# Allegro board CAEN_BUFFER.brd

Outline 406.4 x 406.4 mm; copper layers: TOP, VTT, GND, VCC, BOTTOM. Coordinates in mm from the lower left corner of the outline.
Outline path: rectangle 0,0 406.4,406.4

## Placement (name value [footprint] x y rotation side)
C1  1.0UF  [CAP805]  188.21 233.81 180 bottom
C2  1UF  [CAP805]  201.68 250.95 90 top
C3  1UF  [CAP805]  197.87 250.95 90 top
C4  1UF  [CAP805]  210.06 252.48 270 top
C5  1UF  [CAP805]  210.06 244.6 270 top
R1  -  [RES805]  188.21 247.27 180 bottom
R2  -  [RES805]  188.21 242.7 180 bottom
R3  -  [RES805]  188.21 238.38 0 bottom
R4  -  [RES805]  188.21 256.29 0 bottom
R5  -  [RES805]  191.77 233.81 180 bottom
R6  -  [RES805]  188.21 228.98 180 bottom
R7  -  [RES805]  191.77 238.38 0 bottom
R8  -  [RES805]  191.77 242.7 180 bottom
R9  111  [RES805]  191.77 228.98 180 bottom
R10  -  [RES805]  194.82 233.81 180 bottom
R11  -  [RES805]  188.21 251.97 180 bottom
R12  0  [RES805]  190.75 256.29 180 bottom
R13  0  [RES805]  190.75 251.97 180 bottom
R14  -  [RES805]  193.55 251.97 0 bottom
R15  -  [RES805]  193.55 256.29 180 bottom
R16  0  [RES805]  204.72 228.98 180 bottom
R17  0  [RES805]  204.98 243.84 180 bottom
R18  -  [RES805]  204.98 239.27 0 bottom
R19  0  [RES805]  206.5 255.27 0 top
R20  0  [RES805]  204.98 234.19 180 bottom
U1  -  [COTO2300_V1]  199.64 237.49 0 top
U2  ***  [SOIC8]  198.63 255.27 0 top
U3  ***  [SOIC8]  210.06 248.41 0 top
U4  -  [DO35]  213.61 237.74 180 top
U5  -  [DO35]  209.55 228.6 0 top

## Library data of the parts
C1 = CSMD0805: part number: CSMD0805-1.0UF,10%,0805,25V
C2-C5 = CSMD0805: part number: CSMD0805-1UF,10%,0805,25V
R1-R8 R10 R11 R14 R15 R18 = RES_L: alternate symbols: (RES400)
R9 = RSMD0805: part number: RSMD0805-111,1%,0805
R12 R13 R16 R17 R19 R20 = RSMD0805: part number: RSMD0805-0,1%,0805
U1 = COTO2342
U2 U3 = THS3062
U4 U5 = 1N4448

## Footprints (pads in the part's own frame, mm; a bottom-side part is the same pattern mirrored in y, then rotated)
CAP805
  rect 1.372x1.27 smd: 1(0,1) 2(0,-1)
COTO2300_V1
  round 1.016 hole 0.533: 1(-1.27,8.89) 2(-1.27,6.35) 3(-1.27,-6.35) 4(-1.27,-8.89) 5(1.27,-8.89) 6(1.27,-6.35) 7(1.27,6.35) 8(1.27,8.89)
DO35
  rect 1.397x1.397 hole 0.635: 1(0,0)
  round 1.397 hole 0.635: 2(0,9.144)
RES805
  rect 1.372x1.27 smd: 1(0,1) 2(0,-1)
SOIC8
  rect 1.27x0.635 smd: 1(-2.477,1.905) 2(-2.477,0.635) 3(-2.477,-0.635) 4(-2.477,-1.905) 5(2.477,-1.905) 6(2.477,-0.635) 7(2.477,0.635) 8(2.477,1.905)

## Nets
GND_POWER: R3.1(A<0>) R9.1(A<0>) R10.1(A<0>) R14.1(A<0>) U4.2(OUT)
VCC: U1.3(CTRL_OUT)
VCC5M: R11.1(A<0>)
VCC15: C2.2(B<0>) C4.2(B<0>)
VCC15M: C3.2(B<0>) C5.1(A<0>)
CTRL: R7.1(A<0>)
IN: R1.1(A<0>) R2.1(A<0>) R4.1(A<0>)
OUT: R19.2(B<0>)
OUT_ATT: R20.2(B<0>) U4.1(IN) U5.2(OUT)
UNNAMED_1_COTO2342_I12_CTRLIN: R7.2(B<0>) U1.2(CTRL_IN)
UNNAMED_1_COTO2342_I12_IN1: R16.1(A<0>) U1.5(IN1)
UNNAMED_1_COTO2342_I12_IN2: R17.1(A<0>) U1.8(IN2)
UNNAMED_1_COTO2342_I12_NC1: R8.2(B<0>) U1.7(NC1)
UNNAMED_1_COTO2342_I12_NC2: R6.2(B<0>) R9.2(B<0>) U1.6(NC2)
UNNAMED_1_COTO2342_I12_NO1: R1.2(B<0>) U1.1(NO1)
UNNAMED_1_COTO2342_I12_NO2: R5.2(B<0>) R10.2(B<0>) U1.4(NO2)
UNNAMED_1_CSMD0805_I27_B: C5.2(B<0>) U3.4(VCC-)
UNNAMED_1_CSMD0805_I28_A: C4.1(A<0>) U3.8(VCC+)
UNNAMED_1_CSMD0805_I29_A: C3.1(A<0>) U2.4(VCC-)
UNNAMED_1_CSMD0805_I30_A: C2.1(A<0>) U2.8(VCC+)
UNNAMED_1_CSMD0805_I38_B: C1.2(B<0>) R5.1(A<0>) R6.1(A<0>)
UNNAMED_1_RESL_I1_B: R4.2(B<0>) R12.1(A<0>)
UNNAMED_1_RESL_I6_B: R11.2(B<0>) R13.1(A<0>)
UNNAMED_1_RESL_I10_B: R2.2(B<0>) R3.2(B<0>) R8.1(A<0>)
UNNAMED_1_RESL_I16_B: R13.2(B<0>) R14.2(B<0>) U2.3(IN+)
UNNAMED_1_RESL_I18_A: R12.2(B<0>) R15.1(A<0>) U2.2(IN-)
UNNAMED_1_RESL_I18_B: R15.2(B<0>) R19.1(A<0>) U2.1(OUT)
UNNAMED_1_RESL_I20_A: R16.2(B<0>) R18.1(A<0>) U3.2(IN-)
UNNAMED_1_RESL_I20_B: R18.2(B<0>) R20.1(A<0>) U3.1(OUT)
UNNAMED_1_RSMD0805_I32_B: R17.2(B<0>) U3.3(IN+)
VREF2M: U5.1(IN)
VREF5M: C1.1(A<0>)

Pads without a net: U2 5 6 7; U3 5 6 7

## Via types
v1: diameter 0.61, hole 0.33, TOP to BOTTOM, 8 vias

## Routing (per net, layer and track width the routed paths; a pad name or vN(x,y) marks a point on that pad's centre or on a via; arc(x,y) is an arc through that point)
OUT_ATT: length 15.4
  TOP w0.127: U4.1 U5.2
  BOTTOM w0.127: U5.2 209.55,232.11 204.98,232.11 R20.2
UNNAMED_1_COTO2342_I12_CTRLIN: length 19.4
  BOTTOM w0.127: R7.2 201.87,239.38 201.87,244.54 198.37,244.54 U1.2
UNNAMED_1_COTO2342_I12_IN1: length 5.2
  BOTTOM w0.127: R16.1 200.91,229.98 U1.5
UNNAMED_1_COTO2342_I12_IN2: length 5.6
  BOTTOM w0.127: R17.1 204.98,246.38 U1.8
UNNAMED_1_COTO2342_I12_NC1: length 12.9
  BOTTOM w0.127: U1.7 200.91,240.87 191.77,240.87 R8.2
UNNAMED_1_COTO2342_I12_NC2: length 19.5
  TOP w0.127: U1.6 199.58,231.14 199.58,227.16 v1(190.63,227.16)
  BOTTOM w0.127: R9.2 191.77,227.16 v1(190.63,227.16) 188.21,227.16 R6.2
UNNAMED_1_COTO2342_I12_NO1: length 11.9
  BOTTOM w0.127: R1.2 188.21,245.44 198.37,245.44 U1.1
UNNAMED_1_COTO2342_I12_NO2: length 18.6
  TOP w0.127: v1(191.77,231.44) 191.77,228.6 U1.4
  BOTTOM w0.127: R10.2 194.82,228.6 U1.4 ; R5.2 v1(191.77,231.44)
UNNAMED_1_CSMD0805_I27_B: length 5.5
  TOP w0.127: C5.2 206.5,244.6 206.5,246.51 U3.4
UNNAMED_1_CSMD0805_I28_A: length 5.3
  TOP w0.127: U3.8 213.36,250.32 213.36,252.48 C4.1
UNNAMED_1_CSMD0805_I29_A: length 5.3
  TOP w0.127: U2.4 195.07,253.37 195.07,250.95 C3.1
UNNAMED_1_CSMD0805_I30_A: length 8.3
  TOP w0.127: C2.1 199.85,250.95 199.85,257.18 U2.8
UNNAMED_1_CSMD0805_I38_B: length 10.9
  BOTTOM w0.127: R5.1 191.77,235.63 189.85,235.63 189.85,231.98 188.21,231.98 ; 188.21,231.98 R6.1 ; 188.21,231.98 C1.2
UNNAMED_1_RESL_I1_B: length 4.7
  BOTTOM w0.127: R12.1 190.75,258.37 188.21,258.37 R4.2
UNNAMED_1_RESL_I6_B: length 8.3
  BOTTOM w0.127: R13.1 190.75,253.79 189.47,253.79 189.47,249.89 188.21,249.89 R11.2
UNNAMED_1_RESL_I10_B: length 10.4
  BOTTOM w0.127: R2.2 188.21,240.87 ; 188.21,240.87 R3.2 ; 188.21,240.87 189.98,240.87 189.98,244.52 191.77,244.52 R8.1
UNNAMED_1_RESL_I16_B: length 11.9
  TOP w0.127: U2.3 194.04,254.63 194.04,254.2 v1(193.55,254.2)
  BOTTOM w0.127: R13.2 190.75,250.14 192.36,250.14 192.36,254.2 v1(193.55,254.2) R14.2
UNNAMED_1_RESL_I18_A: length 13.9
  TOP w0.127: U2.2 193.55,255.91 v1(193.55,258.61)
  BOTTOM w0.127: R12.2 190.75,254.46 192.27,254.46 192.27,258.11 193.55,258.11 ; 193.55,258.11 v1(193.55,258.61) ; 193.55,258.11 R15.1
UNNAMED_1_RESL_I18_B: length 20.2
  TOP w0.127: R19.1 206.5,257.94 197.47,257.94 v1(197.47,257.18) U2.1
  BOTTOM w0.127: R15.2 194.17,255.29 194.17,254.46 197.47,254.46 v1(197.47,257.18)
UNNAMED_1_RESL_I20_A: length 38
  TOP w0.127: v1(204.03,236.87) 204.03,237.36 203.73,237.36 203.73,249.05 U3.2
  BOTTOM w0.127: R18.1 204.03,238.27 v1(204.03,236.87) 199.96,236.87 199.96,227.16 204.72,227.16 R16.2
UNNAMED_1_RESL_I20_B: length 19.5
  TOP w0.127: U3.1 v1(205.99,250.32)
  BOTTOM w0.127: 205.92,241.09 205.99,241.09 v1(205.99,250.32) ; 205.92,241.09 205.92,235.19 R20.1 ; 205.92,241.09 204.98,241.09 R18.2
UNNAMED_1_RSMD0805_I32_B: length 9.7
  TOP w0.127: v1(204.98,241.76) 204.98,247.78 207.58,247.78
  BOTTOM w0.127: R17.2 v1(204.98,241.76)
